# Altium PCB Acond_Presion_PCB.PcbDoc
Units mil, origin at the board's own origin, x right, y up, seen from the top; angles counter-clockwise.
Board outline 3150 x 1585 mil, 2 copper layers (Top Layer, Bottom Layer); 37 components, 22 nets, 98 pads, 0 vias.
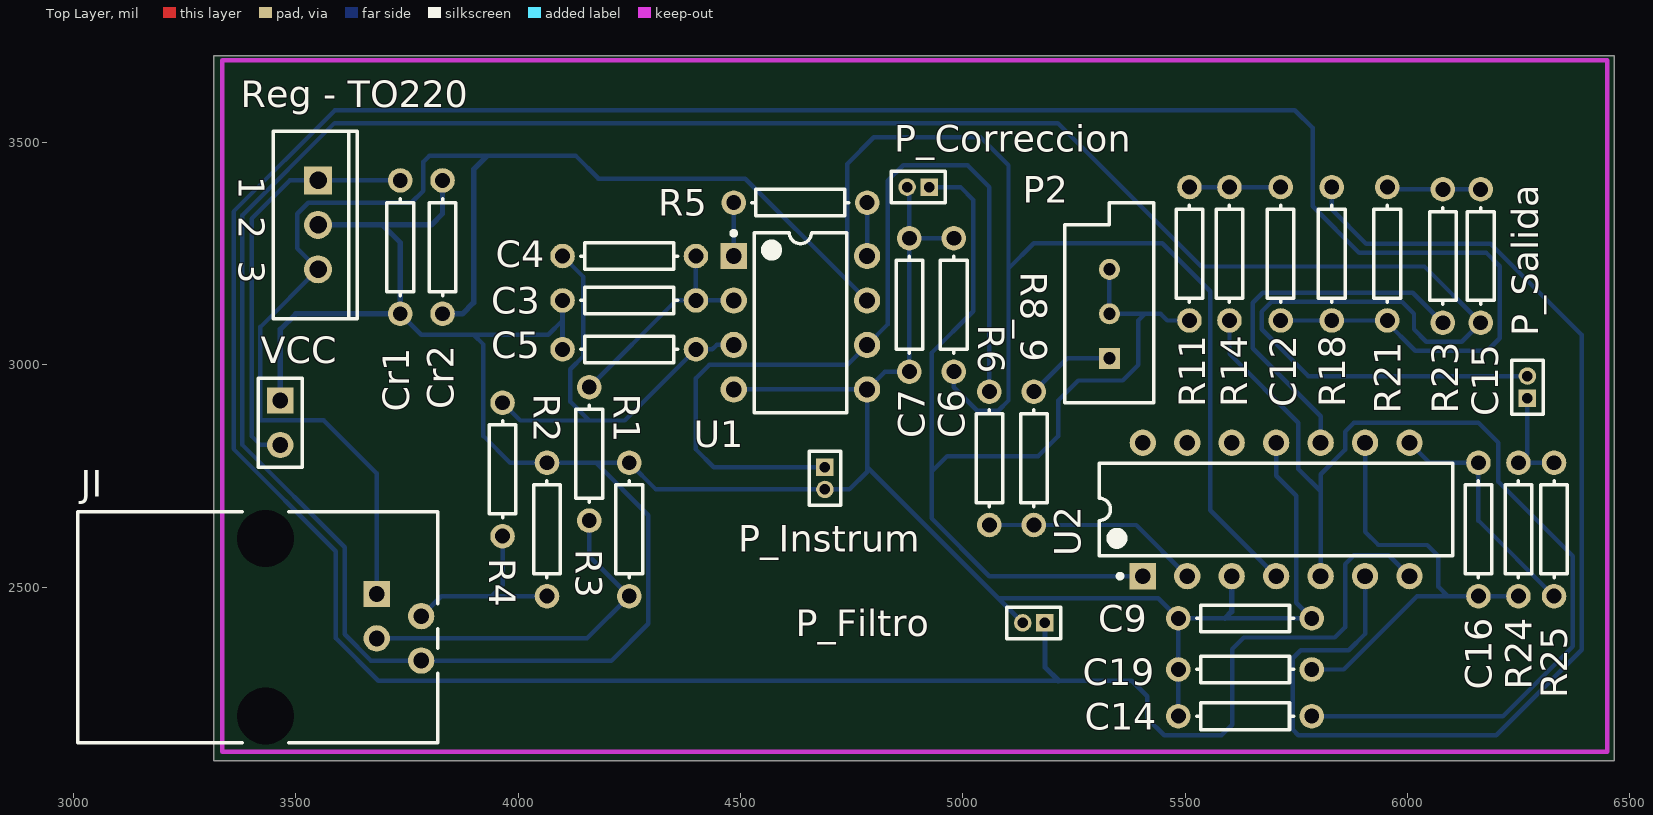
[diagram p0: Top Layer view]
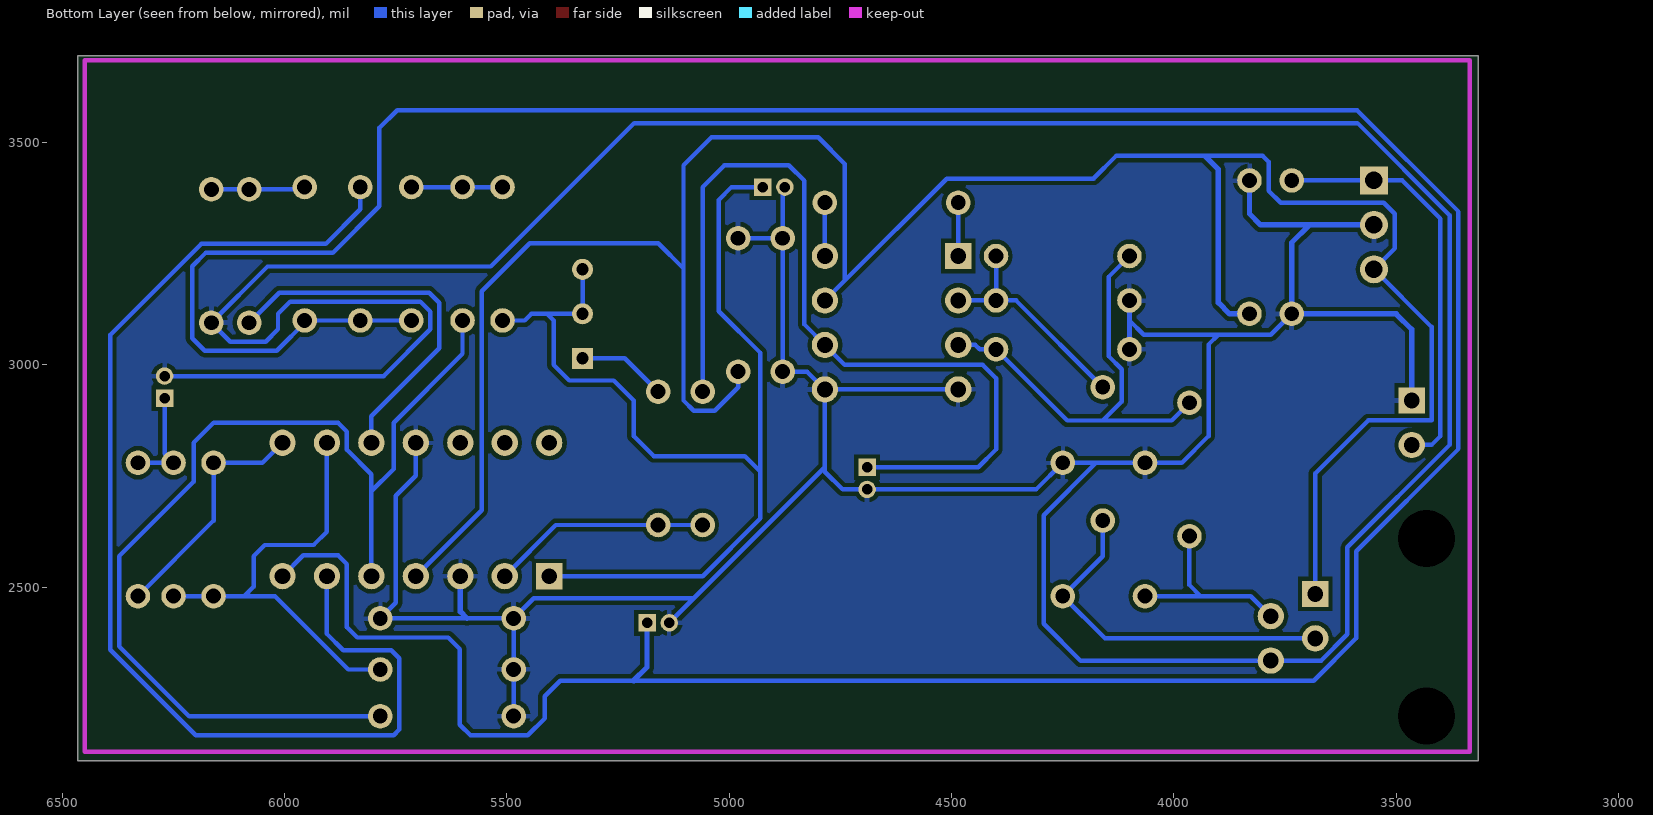
[diagram p1: Bottom Layer view, seen from below]

## Layer stack, top to bottom
Top Layer: signal copper 1.4
Dielectric: dielectric 12.6, FR-4, Dk 4.8
Bottom Layer: signal copper 1.4

## Board outline
3315,3695 3315,2110 6465,2110 6465,3695 3315,3695

## Design rules (kind name [scope] priority, off if disabled: settings)
Clearance [All] p1: gap=10
PolygonConnect [All] p1: connectstyle=Relief reliefconductorwidth=10 reliefentries=4 polygonreliefangle="90 Angle"
RoomDefinition Acondicionamiento_Presion [InComponentClass('Acondicionamiento_Presion')] p1: confinementstyle=ConfineIn formatcopy=TRUE lockcomponents=FALSE outline 2975,2130 6450,2130 6450,3685 2975,3685
RoutingLayers [All] p1: top layer_v5=FALSE bottom layer_v5=TRUE
RoutingVias [All] p1: holewidth=28 width=50 viastyle="Through Hole" minholewidth=28 minwidth=50 maxholewidth=28 maxwidth=50
SilkscreenOverComponentPads [All] p1: minsilkscreentomaskgap=10
SolderMaskExpansion [All] p1: expansion=4
Width [All] p1: maxlimit=12 minlimit=10 preferedwidth=10
26 further rules are at their usual default settings.

## Components (designator, comment, footprint, x,y, rotation, side; value= is the part's Value field where it differs from the comment)
C3 "Cap" AXIAL-0.3 4250,3145 r180 top
C4 "Cap" AXIAL-0.3 4250,3245 r0 top
C5 "Cap" AXIAL-0.3 4250,3035 r0 top
C6 "Cap" AXIAL-0.3 4980,3135 r90 top
C7 "Cap" AXIAL-0.3 4880,3135 r270 top
C9 "Cap" AXIAL-0.3 5635,2430 r180 top
C12 "Cap" AXIAL-0.3 5715,3250 r90 top
C14 "Cap" AXIAL-0.3 5635,2210 r180 top
C15 "Cap" AXIAL-0.3 6165,3245 r270 top
C16 "Cap" AXIAL-0.3 6160,2630 r90 top
C19 "Cap" AXIAL-0.3 5635,2315 r180 top
Cr1 "Cap" AXIAL-0.3 3735,3265 r270 top
Cr2 "Cap" AXIAL-0.3 3830,3265 r90 top
JI "15-43-8564" 15-43-8564 3010,2410 r270 top
P2 "RPot" VR5 5330,3115 r90 top
P_Correccion "MHDR1X2" MHDR1X2 4925,3400 r180 top
P_Filtro "MHDR1X2" MHDR1X2 5185,2420 r180 top
P_Instrum "MHDR1X2" MHDR1X2 4690,2770 r270 top
P_Salida "MHDR1X2" MHDR1X2 6270,2925 r90 top
R1 "Res2" AXIAL-0.3 4250,2630 r270 top
R2 "Res2" AXIAL-0.3 4065,2630 r270 top
R3 "Res2" AXIAL-0.3 4160,2800 r90 top
R4 "Res2" AXIAL-0.3 3965,2765 r90 top
R5 "Res2" AXIAL-0.3 4635,3365 r180 top
R6 "Res2" AXIAL-0.3 5060,2790 r270 top
R8_9 "Res2" AXIAL-0.3 5160,2790 r90 top
R11 "Res2" AXIAL-0.3 5510,3250 r90 top
R14 "Res2" AXIAL-0.3 5600,3250 r270 top
R18 "Res2" AXIAL-0.3 5830,3250 r270 top
R21 "Res2" AXIAL-0.3 5955,3250 r90 top
R23 "Res2" AXIAL-0.3 6080,3245 r270 top
R24 "Res2" AXIAL-0.3 6250,2630 r90 top
R25 "Res2" AXIAL-0.3 6330,2630 r90 top
"Reg - TO220" "Volt Reg" TO-220-AB 3550,3315 r270 top
U1 "AD620 / INA122" DIP-8 4635,3095 r0 top
U2 "MC34074" DIP-14 5705,2675 r90 top
VCC "Header 2" HDR1X2 3465,2920 r270 top

## Footprints (in the part's own frame and the unit in brackets; to place one, negate y for a bottom-side part, rotate by r counter-clockwise, add the part's x,y. Pads: shape width x height; smd on the part's side, far side on the other; paste and mask are expansions set on the pad)
15-43-8564 [mm] "Connector; PCB Jack, Thru-Hole; 1-Port, 6 Positions, 4 Loaded; Unshielded without Lightpipes; Right Angle"
  rect 1.5x1.5 hole 0.9: 1(-1.905,17.07)
  round 1.5 hole 0.9: 2(-0.635,19.61) 3(0.635,17.07) 4(1.905,19.61)
  round 2.95 hole 3.25 unplated: MH1(-5.08,10.72) MH2(5.08,10.72)
  silkscreen extent -6.61,0 6.6,20.57
AXIAL-0.3 [mm] "Axial Device, Thru-Hole; 2 Leads; 0.3 in Pin Spacing"
  round 1.4 hole 0.85: 1(-3.81,0) 2(3.81,0)
  silkscreen extent -2.77,-0.76 2.77,0.76
DIP-8 [mm] "DIP; 8 Leads; Row Spacing 7.62 mm; Pitch 2.54 mm"
  rect 1.5x1.5 hole 0.9: 1(-3.81,3.81)
  round 1.5 hole 0.9: 2(-3.81,1.27) 3(-3.81,-1.27) 4(-3.81,-3.81) 5(3.81,-3.81) 6(3.81,-1.27) 7(3.81,1.27) 8(3.81,3.81)
  silkscreen extent -3.93,-5.15 2.65,5.23, body extent -3.6,-5.15 3.6,5.15, height 5.08
DIP-14 [mm] "DIP; 14 Leads; Row Spacing 7.62 mm; Pitch 2.54 mm"
  rect 1.5x1.5 hole 0.9: 1(-3.81,7.62)
  round 1.5 hole 0.9: 2(-3.81,5.08) 3(-3.81,2.54) 4(-3.81,0) 5(-3.81,-2.54) 6(-3.81,-5.08) 7(-3.81,-7.62) 8(3.81,-7.62) 9(3.81,-5.08) 10(3.81,-2.54) 11(3.81,0) 12(3.81,2.54) 13(3.81,5.08) 14(3.81,7.62)
  silkscreen extent -3.93,-10.1 2.65,10.1, body extent -3.6,-10.1 3.6,10.1, height 5.08
HDR1X2 [mm] "Connector; Header; 2 Position"
  rect 1.5x1.5 hole 0.9: 1(0,0)
  round 1.5 hole 0.9: 2(2.54,0)
  silkscreen extent -1.27,-1.27 3.81,1.27
MHDR1X2 [mm] "Connector; Header; 2 Position"
  rect 1x1 hole 0.6: 1(0,0)
  round 1 hole 0.6: 2(1.27,0)
  silkscreen extent -0.9,-0.9 2.17,0.9
TO-220-AB [mm] "TO, Thru-Hole, Vertical, Heatsink Mounted; 3 In-Line Leads; Pitch 2.54 mm"
  rect 1.6x1.6 hole 1: 1(-2.54,0)
  round 1.6 hole 1: 2(0,0) 3(2.54,0)
  silkscreen extent -5.35,-2.55 5.35,2.25
VR5 [mm] "Thru-Hole; 3 Leads"
  rect 1.2x1.2 hole 0.7: 1(-2.54,0)
  round 1.2 hole 0.7: 2(0,0) 3(2.54,0)
  silkscreen extent -5.08,-2.54 6.35,2.54

## Part data
C3 C4 C5 C6 C7 C9 C12 C14 C15 C16 C19 Cr1 Cr2: "Capacitor"
JI: "Right Angle, Standard Profile, Unshielded PCB Jack"
P2: "Potentiometer"
P_Correccion P_Filtro P_Instrum P_Salida VCC: "Header, 2-Pin"
R1 R2 R3 R4 R5 R6 R8_9 R11 R14 R18 R21 R23 R24 R25: "Resistor"
"Reg - TO220": "Voltage Regulator"
U1: library part AD620BN, "Low-Cost, Low-Power Instrumentation Amplifier"
U2: library part AD713BQ, "Quad Precision Low Cost High-Speed BiFET Operational Amplifier"

## Nets (pads, with @x,y where several pads share a name; then routed paths per layer and width w, separated by ;. In a path a pad name is that pad's centre, name@x,y a point inside that pad or via, vN(x,y) a via of type N, cw(c..) or ccw(c..) an arc to the next point about the centre after c; other vN are vias at no path point)
GND: "Reg - TO220.2" C3.2 C5.1 C6.2 C7.1 C7.2 C9.1 C9.2 C14.2 C15.2 C19.2 Cr1.2 Cr2.2 JI.4 P_Correccion.2 P_Filtro.2 P_Instrum.2 P_Salida.2 R1.1 R2.1 U1.4 U1.5 U2.3 U2.11 VCC.1 | length 12301.1
  Bottom Layer w10: Cr1.2 3782,3068 3900,3068 ; 4100,3100 4068,3068 3900,3068 ; U1.4 U1.5 ; P_Correccion.2 4880,3395 C7.1 ; C6.2 C7.1 ; P_Filtro.2 5080,2475 ; C14.2 C19.2 C9.2 ; C9.2@5485,2443 C9.2 ; U2.11 5705,2751 5750,2706 5750,2465 C9.1 5590,2430 C9.2 ; P_Salida.2 5777.44,2975 5672.44,3080 5672.44,3120 5695,3142.56 5987.44,3142.56 6015,3115 6015,3080 6042.56,3052.44 6122.44,3052.44 C15.2 6038.6,3221.4 5536.6,3221.4 5214,3544 3587.28,3544 3380,3336.72 3380,2820 3610,2590 3610,2394 3669,2335 JI.4 4210,2335 4293,2418 4293,2662 4175,2780 ; 3900,3068 3922,3046 3922,2840 3982,2780 R2.1 4175,2780 ; 4175,2780 R1.1 4310,2720 P_Instrum.2 4745,2720 4785,2760 4785,2770 ; 4785,2770 5080,2475 ; 4785,2770 U1.5 ; U1.5 4825,2985 C7.2 C7.1 ; 5080,2475 5440,2475 C9.2
  Bottom Layer w12: VCC.1 3465,3080 3500,3115 Cr1.2 3735,3275 3695,3315 ; 3550,3315 3695,3315 ; Cr2.2 3830,3340 3805,3315 3695,3315 ; C5.1 C3.2 ; 5590,2430 5605,2445 U2.3
NetC3_1: C3.1 C4.2 R3.2 U1.2 | length 505.8
  Bottom Layer w10: R3.2 4355,3145 C3.1 ; C4.2 C3.1 ; U1.2 C3.1
NetC4_1: C4.1 C5.2 R4.2 U1.3 | length 1026.3
  Bottom Layer w10: R4.2 4005,2875 4160,2875 ; C4.1 4147,3198 4147,3020 4117.44,2990.44 4117.44,2917.56 4160,2875 ; U1.3 4447,3045 4437,3035 C5.2 4240,2875 4160,2875
NetC12_1: C12.1 P_Filtro.1 R18.2 R21.1 U2.7 | length 7987.5
  Bottom Layer w10: C12.1 R18.2 5950,3100 6018,3032 6180,3032 6208,3060 6208,3222 6178,3252 5892,3252 5787,3357 5787,3533 5747,3573 3588,3573 3360,3345 3360,2811.03 3590,2581.03 3590,2385.71 3685.71,2290 5215,2290 5380,2290 5415,2255 5415,2205 5453,2167 5582,2167 5606,2191 5606,2361 5632,2387 5837,2387 5860,2410 5860,2552 5880,2572 5958,2572 U2.7
  Bottom Layer w12: P_Filtro.1 5185,2320 5215,2290
NetC12_2: C12.2 R11.2 R14.1 | length 205
  Bottom Layer w10: R11.2 R14.1 C12.2
NetC14_1: C14.1 R14.2 U2.5 | length 2368.3
  Bottom Layer w10: R14.2 5600,3025 5755,2870 5755,2766 5805,2716 ; C14.1 6215,2210 6372.56,2367.56 6372.56,2569.44 6205,2737 6205,2825 6160,2870 5880,2870 5860,2850 5860,2809 5805,2754 5805,2716 ; U2.5 5805,2716
NetC15_1: C15.1 R21.2 R23.1 | length 210
  Bottom Layer w10: R21.2@5955,3395 R23.1 C15.1
NetC16_1: C16.1 C19.1 R24.1 U2.9 | length 1034.8
  Bottom Layer w10: C19.1 5856.79,2315 6021.79,2480 C16.1 ; U2.9 5905,2625 5935,2595 6045,2595 6070,2570 6070,2500.9 6090.9,2480 ; C16.1@6145,2480 C16.1 ; R24.1 C16.1
NetC16_2: C16.2 R25.1 U2.8 | length 544.1
  Bottom Layer w10: U2.8 6050,2780 C16.2 6160,2650 R25.1
NetCr1_1: "Reg - TO220.1" Cr1.1 VCC.2 | length 931.9
  Bottom Layer w10: VCC.2 3420.47,2820 3400.47,2840 3400.47,3328.9 3486.57,3415 3550,3415 Cr1.1
NetJI_2: JI.2 R2.2 R4.1 | length 446.9
  Bottom Layer w10: JI.2 3827.05,2480 R2.2 ; 3940,2480 3965,2505 R4.1
NetJI_3: JI.3 R1.2 R3.1 | length 814.6
  Bottom Layer w10: JI.3 4155,2385 R1.2 4160,2570 R3.1
NetP2_1: P2.1 R8_9.2 | length 201.1
  Bottom Layer w10: R8_9.2 5235,3015 P2.1
NetP2_2: P2.2 P2.3 P_Correccion.1 R11.1 U2.1 | length 2413.5
  Bottom Layer w10: P_Correccion.1 4995,3400 5024,3371 5024,3121 4930,3027 4930,2655 5060,2525 U2.1 ; 4930,2760 4965,2795 5170,2795 5215,2840 5215,2920 5260,2965 5360,2965 5395,3000 5395,3100 5410,3115 ; P2.3 P2.2 5445,3115 5460,3100 R11.1
NetP_Instrum_1: P_Instrum.1 R6.1 U1.6 | length 1994.5
  Bottom Layer w10: P_Instrum.1 4440,2770 4400,2810 4400,2970 4430,3000 4740,3000 U1.6 4831,3091 4831,3414 4866,3449 5011,3449 5060,3400 R6.1
NetP_Salida_1: P_Salida.1 R24.2 R25.2 | length 233.3
  Bottom Layer w10: P_Salida.1 6270,2800 R24.2 R25.2
NetR5_1: R5.1 U1.8 | length 120
  Bottom Layer w10: U1.8 R5.1
NetR5_2: R5.2 U1.1 | length 120
  Bottom Layer w10: U1.1 R5.2
NetR6_2: R6.2 R8_9.1 U2.2 | length 492.6
  Bottom Layer w10: R6.2 R8_9.1 5390,2640 U2.2
NetR18_1: R18.1 U2.6 | length 2649.1
  Bottom Layer w10: R18.1 5830,3350 5907.82,3272.18 6187.82,3272.18 6392.56,3067.44 6392.56,2359.27 6200.28,2167 5755,2167 5742,2180 5742,2340 5760,2358 5868,2358 5905,2395 U2.6
NetR23_2: R23.2 U2.10 | length 843.1
  Bottom Layer w10: U2.10 5805,2884.88 5652.44,3037.44 5652.44,3140 5675,3162.56 6012.44,3162.56 R23.2
VCC: "Reg - TO220.3" C6.1 Cr2.1 JI.1 U1.7 U2.4 | length 5669.7
  Bottom Layer w10: JI.1 3682.05,2755.95 3562.53,2875.47 3420.47,2875.47 3420.47,3085.47 3550,3215 3503,3262 3503,3340 3528,3365 3760,3365 3787,3392 3787,3457 3800,3470 3930,3470 4130,3470 4180,3420 ; 4180,3419 4511,3419 4740,3190 ; U1.7 4740,3190 ; C6.1 4980,2950 5033,2897 5080,2897 5103,2920 5103,3217 ; U2.4 5557,2673 5557,3166 5449,3274 5160,3274 5103,3217 ; 4740,3190 4740,3452 4800,3512 5040,3512 5103,3449 5103,3217
  Bottom Layer w12: Cr2.1 3875,3115 3900,3140 3900,3440 3930,3470
pads on no net: JI.MH1 JI.MH2 U2.12 U2.13 U2.14

## Polygon pours and split planes (outlines as drawn)
GND on Bottom Layer "Bottom Layer-No Net" (solid, remove dead copper, pour order 2): 3335,3685 3335,2130 6450,2130 6450,3685

## Keep-outs
Keep-Out Layer:
  lines w10: 3335,2130 3335,3685 6450,3685 6450,2130 3335,2130

## Dimensions
3335,3685 to 3335,2130 on Keep-Out Layer
3335,3685 to 6450,3685 on Keep-Out Layer

## Text inside footprints (layer, text, board x,y; h text height)
"Reg - TO220": Top Overlay "3" at 3371.85,3234.68 h59.06 r270; Top Overlay "2" at 3371.85,3334.68 h59.06 r270; Top Overlay "1" at 3371.85,3424.84 h59.06 r270